# EAGLE board shematic (EAGLE 5.07)

Size 100 x 80 mm. Coordinates in mm from the lower left corner, seen from the top.
Outline: 0,0 100,0 100,80 0,80 0,0
Copper layers (1*16): Top 0.035mm / dielectric 1.5mm / Bottom 0.035mm
Design rules "default": minimum track width 10mil, minimum drill 24mil, track to track 8mil, track to pad 8mil, pad to pad 8mil, via to via 8mil, smd to smd 8mil, copper to edge 40mil, drill to drill 8mil, minimum pad ring 10mil, minimum via ring 8mil, stop-mask expansion 4mil, vias tented up to drill 0mil, thermal gap 10mil

## Footprints (pad centres in the part's own frame; a part is rotated, then mirrored left to right if it is on the bottom)
C0805 = smd 1.3 x 1.5: 1 -0.95,0; 2 0.95,0
MA20-1 = drill 1.016 long: 1 -24.13,0; 2 -21.59,0; 3 -19.05,0; 4 -16.51,0; 5 -13.97,0; 6 -11.43,0; 7 -8.89,0; 8 -6.35,0; 9 -3.81,0; 10 -1.27,0; 11 1.27,0; 12 3.81,0; 13 6.35,0; 14 8.89,0; 15 11.43,0; 16 13.97,0; 17 16.51,0; 18 19.05,0; 19 21.59,0; 20 24.13,0
MA12-1 = drill 1.016 long: 1 -13.97,0; 2 -11.43,0; 3 -8.89,0; 4 -6.35,0; 5 -3.81,0; 6 -1.27,0; 7 1.27,0; 8 3.81,0; 9 6.35,0; 10 8.89,0; 11 11.43,0; 12 13.97,0
JEDEC_MS-026 = smd 1.2 x 0.27: P1 -6.06,3.535; P2 -6.06,3.03; P3 -6.06,2.525; P4 -6.06,2.02; P5 -6.06,1.515; P6 -6.06,1.01; P7 -6.06,0.505; P8 -6.06,0; P9 -6.06,-0.505; P10 -6.06,-1.01; P11 -6.06,-1.515; P12 -6.06,-2.02; P13 -6.06,-2.525; P14 -6.06,-3.03; P15 -6.06,-3.535; P16 -6.06,-4.04; P33 5.555,-4.04; P34 5.555,-3.535; P35 5.555,-3.03; P36 5.555,-2.525; P37 5.555,-2.02; P38 5.555,-1.515; P39 5.555,-1.01; P40 5.555,-0.505; P41 5.555,0; P42 5.555,0.505; P43 5.555,1.01; P44 5.555,1.515; P45 5.555,2.02; P46 5.555,2.525; P47 5.555,3.03; P48 5.555,3.535 | smd 0.27 x 1.2: P17 -4.04,-6.06; P18 -3.535,-6.06; P19 -3.03,-6.06; P20 -2.525,-6.06; P21 -2.02,-6.06; P22 -1.515,-6.06; P23 -1.01,-6.06; P24 -0.505,-6.06; P25 0,-6.06; P26 0.505,-6.06; P27 1.01,-6.06; P28 1.515,-6.06; P29 2.02,-6.06; P30 2.525,-6.06; P31 3.03,-6.06; P32 3.535,-6.06; P49 3.535,5.555; P50 3.03,5.555; P51 2.525,5.555; P52 2.02,5.555; P53 1.515,5.555; P54 1.01,5.555; P55 0.505,5.555; P56 0,5.555; P57 -0.505,5.555; P58 -1.01,5.555; P59 -1.515,5.555; P60 -2.02,5.555; P61 -2.525,5.555; P62 -3.03,5.555; P63 -3.535,5.555; P64 -4.04,5.555

## Placement (x,y rotation side)
C1  [C0805]  -40.64,45.72 0 top  (outside the outline)
C2  [C0805]  -45.72,45.72 0 top  (outside the outline)
C3  [C0805]  -50.8,45.72 0 top  (outside the outline)
C4  [C0805]  -15.24,50.8 0 top  (outside the outline)
C5  [C0805]  -20.32,50.8 0 top  (outside the outline)
C6  [C0805]  -25.4,50.8 0 top  (outside the outline)
C7  [C0805]  -30.48,50.8 0 top  (outside the outline)
C8  [C0805]  -35.56,50.8 0 top  (outside the outline)
C9  [C0805]  -40.64,50.8 0 top  (outside the outline)
C10  [C0805]  -15.24,45.72 0 top  (outside the outline)
C11  [C0805]  -20.32,45.72 0 top  (outside the outline)
C12  [C0805]  -25.4,45.72 0 top  (outside the outline)
C13  [C0805]  -30.48,45.72 0 top  (outside the outline)
C14  [C0805]  -35.56,45.72 0 top  (outside the outline)
SV1  [MA20-1]  30.48,36.83 0 top
SV2  [MA20-1]  30.48,59.69 0 top
SV3  [MA12-1]  71.12,59.69 180 top
SV4  [MA12-1]  71.12,36.83 180 top
U$1  AT32UC3B0  [JEDEC_MS-026]  46.99,48.26 45 top

## Library data of the parts
C1-C14 = rcl
SV1-SV4 = con-lstb
U$1 = UC3Bxxxx

## Nets
1: U$1.P1
02: U$1.P2
03: U$1.P3
04: U$1.P4
05: U$1.P5
06: U$1.P6
07: U$1.P7
08: U$1.P8
09: U$1.P9
10: U$1.P10
11: U$1.P11
12: U$1.P12
13: U$1.P13
14: U$1.P14
15: U$1.P15
16: U$1.P16
17: U$1.P17
18: U$1.P18
19: U$1.P19
20: U$1.P20
21: U$1.P21
22: U$1.P22
23: U$1.P23
24: U$1.P24
25: U$1.P25
26: U$1.P26
27: U$1.P27
28: U$1.P28
29: U$1.P29
30: U$1.P30
31: U$1.P31
32: U$1.P32
33: U$1.P33
34: U$1.P34
35: U$1.P35
36: U$1.P36
37: U$1.P37
38: U$1.P38
39: U$1.P39
40: U$1.P40
41: U$1.P41
42: U$1.P42
43: U$1.P43
44: U$1.P44
45: U$1.P45
46: U$1.P46
47: U$1.P47
48: U$1.P48
49: U$1.P49
50: U$1.P50
51: U$1.P51
52: U$1.P52
53: U$1.P53
54: U$1.P54
55: U$1.P55
56: U$1.P56
57: U$1.P57
58: U$1.P58
59: U$1.P59
60: U$1.P60
61: U$1.P61
62: U$1.P62
63: U$1.P63
64: U$1.P64